# Altium PCB WiDSO.PcbDoc
Units mil, origin at the board's own origin, x right, y up, seen from the top; angles counter-clockwise.
Board outline 3366.26 x 2126.1 mil, 2 copper layers (Component Side, Bottom Layer), stack 12.8 mil thick; 52 components, 116 nets, 361 pads, 118 vias.
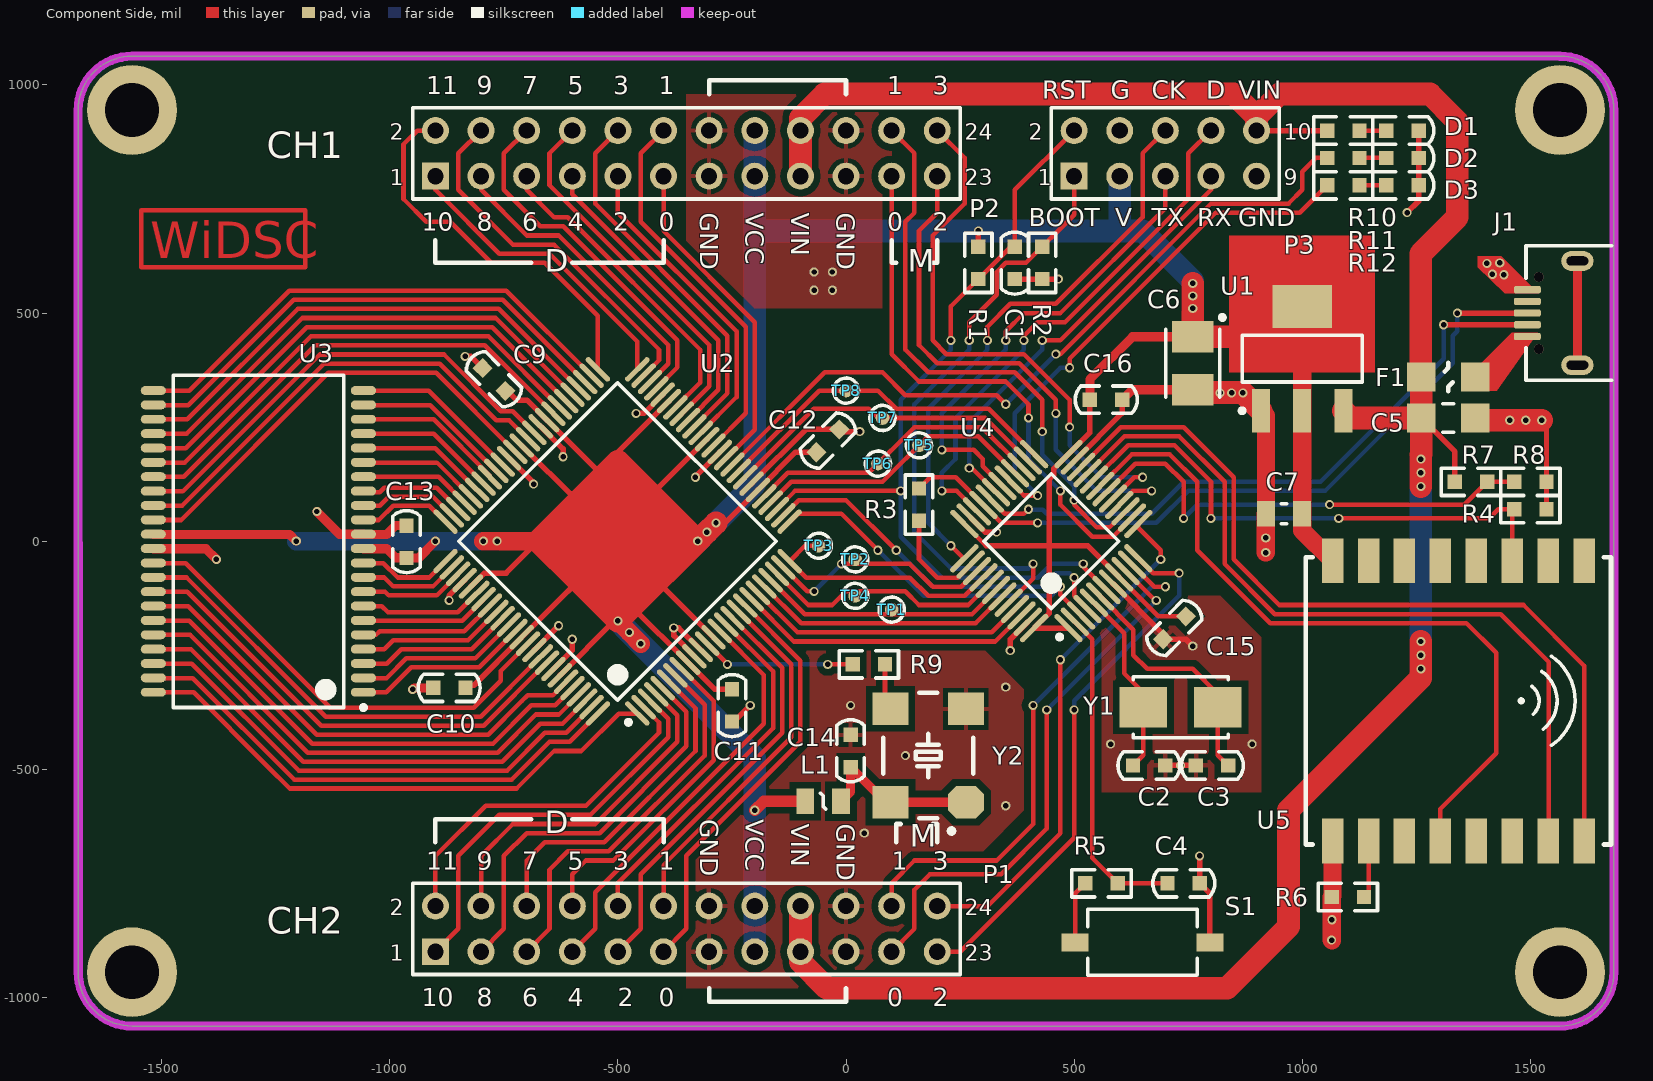
[diagram p0: Component Side view]
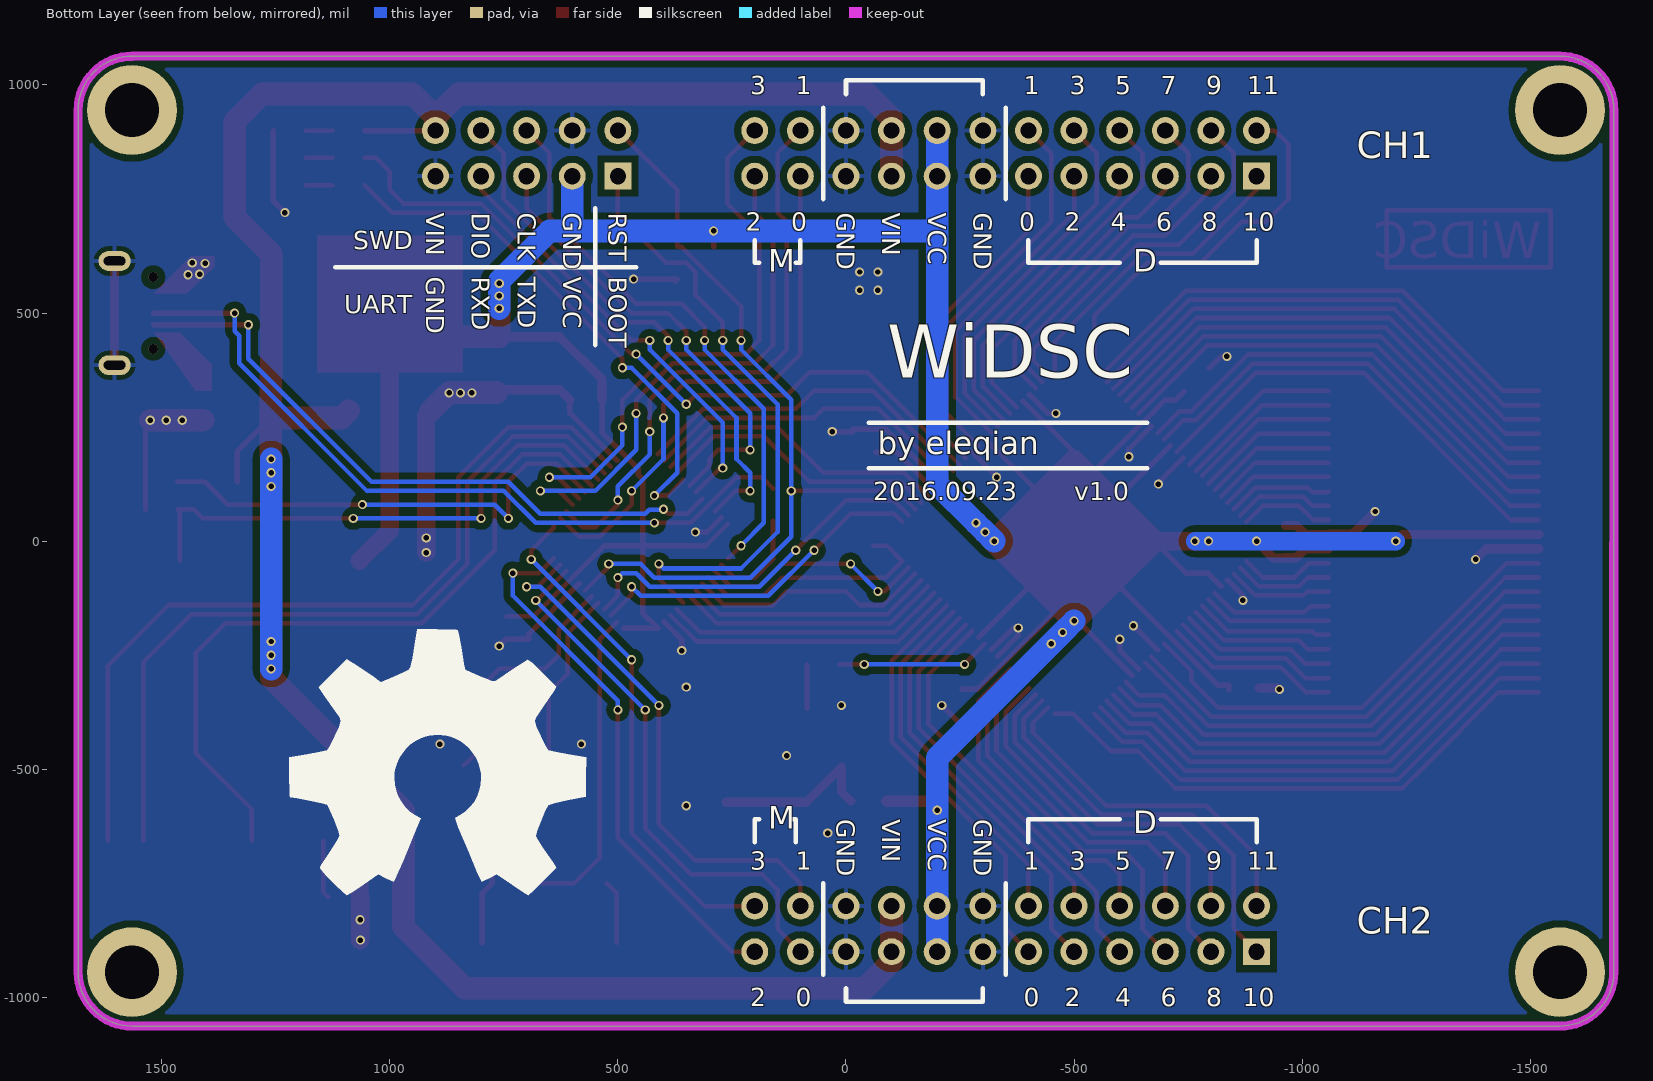
[diagram p1: Bottom Layer view, seen from below]

## Layer stack, top to bottom
Top Solder: solder mask 0.4, Solder Resist, Dk 3.5
Component Side: signal copper 1.4
Dielectric 1: core 10, FR-4, Dk 4.2
Bottom Layer: signal copper 1.4
Solder Side: solder mask 0.4, Solder Resist, Dk 3.5

## Board outline
-1683.07,-944.88 -1683.18,944.99 cw(c-1565.07,944.99) -1565.07,1063.1 1564.96,1063.1 1564.96,1062.99 cw(c1564.96,944.88) 1683.07,944.88 1683.07,-944.88 cw(c1564.96,-944.88) 1564.96,-1062.99 -1564.96,-1062.99 cw(c-1564.96,-944.88)

## Design rules (kind name [scope] priority, off if disabled: settings)
Clearance Clearance_Polygon [InNamedPolygon('GND-T') Or InNamedPolygon('GND-B')] p1: gap=15
Clearance [All] p2: gap=6
DiffPairsRouting [All] p1: maxlimit=10 minlimit=8 mostfreqgap=10 toplayer_minwidth=15 toplayer_maxwidth=15 toplayer_prefwidth=15 bottomlayer_minwidth=15 bottomlayer_maxwidth=15 bottomlayer_prefwidth=15 maxuncoupledlength=500
HoleSize [All] p1: absolutevalues=TRUE maxlimit=1574.8 minlimit=3.94 maxpercent=80.000 minpercent=20.000
MinimumSolderMaskSliver [All] p1: minsoldermaskwidth=0
PolygonConnect PolygonConnect_Via [IsVia] p1: connectstyle=Direct reliefconductorwidth=10 reliefentries=4 polygonreliefangle="90 Angle" airgapwidth=10
PolygonConnect [All] p2: connectstyle=Relief reliefconductorwidth=10 reliefentries=4 polygonreliefangle="90 Angle" airgapwidth=10
RoomDefinition SampleCtrl [InComponentClass('SampleCtrl')] p1 off: confinementstyle=ConfineIn formatcopy=TRUE lockcomponents=FALSE outline 1754.57,580 1980,580 1980,745 1754.57,745
RoomDefinition PowerMisc [InComponentClass('PowerMisc')] p2 off: confinementstyle=ConfineIn formatcopy=TRUE lockcomponents=FALSE outline 1758.11,190 1970,190 1970,333.15 1758.11,333.15
RoomDefinition ExtConn [InComponentClass('ExtConn')] p3 off: confinementstyle=ConfineIn formatcopy=TRUE lockcomponents=FALSE outline 1760,775 1970,775 1970,965 1760,965
RoomDefinition DSPComm [InComponentClass('DSPComm')] p4 off: confinementstyle=ConfineIn formatcopy=TRUE lockcomponents=FALSE outline 1758.43,390 1970,390 1970,540 1758.43,540
RoutingVias [All] p1: holewidth=12 width=24 viastyle="Through Hole" minholewidth=12 minwidth=20 maxholewidth=60 maxwidth=80
SMDNeckDown [All] p1: percent=150.000
SilkToSilkClearance [All] p1: silktosilkclearance=0
SilkToSolderMaskClearance SilkscreenOverComponentPads [IsPad] p1: minsilkscreentomaskgap=6 clearancetoexposedcopper=TRUE
SolderMaskExpansion [All] p1: expansion=4
Width Width_Power [InNet('GND') OR InNet('VCC') OR InNet('VIN')] p1: maxlimit=50 minlimit=10 preferedwidth=20
Width [All] p2: maxlimit=50 minlimit=8 preferedwidth=10
25 further rules are at their usual default settings.

## Classes and differential pairs
component class PowerMisc: C1 C4 C5 C6 C9 C10 C11 C12 C13 C15 C16 D1 D2 D3 R1 R5 R10 R11 R12 S1 U1
net class CH2_M[0..3]: CH2_M0 CH2_M1 CH2_M2 CH2_M3
net class CH1_M[0..3]: CH1_M0 CH1_M1 CH1_M2 CH1_M3
net class CH2_D[0..11]: CH2_CPLD0 CH2_CPLD1 CH2_CPLD2 CH2_CPLD3 CH2_CPLD4 CH2_CPLD5 CH2_CPLD6 CH2_CPLD7 CH2_CPLD8 CH2_CPLD9 CH2_CPLD10 CH2_CPLD11 CH2_D0 CH2_D1 CH2_D2 CH2_D3 CH2_D4 CH2_D5 CH2_D6 CH2_D7 CH2_D8 CH2_D9 CH2_D10 CH2_D11
net class CH1_D[0..11]: CH1_CPLD0 CH1_CPLD1 CH1_CPLD2 CH1_CPLD3 CH1_CPLD4 CH1_CPLD5 CH1_CPLD6 CH1_CPLD7 CH1_CPLD8 CH1_CPLD9 CH1_CPLD10 CH1_CPLD11 CH1_D0 CH1_D1 CH1_D2 CH1_D3 CH1_D4 CH1_D5 CH1_D6 CH1_D7 CH1_D8 CH1_D9 CH1_D10 CH1_D11
component class ExtConn: P1 P2
component class SampleCtrl: C14 L1 R9 TP1 TP2 TP3 TP4 TP5 TP6 TP7 TP8 U2 U3 Y2
component class DSPComm: C2 C3 C7 F1 J1 P3 R2 R3 R4 R6 R7 R8 U4 U5 Y1
net class MISC[0..2]: MISC0 MISC1 MISC2
net class NIRQ[0..1]: NIRQ0 NIRQ1
net class D[0..15]: D0 D1 D2 D3 D4 D5 D6 D7 D8 D9 D10 D11 D12 D13 D14 D15
net class A[0..18]: A0 A1 A2 A3 A4 A5 A6 A7 A8 A9 A10 A11 A12 A13 A14 A15 A16 A17 A18

## Components (designator, comment, footprint, x,y, rotation, side; value= is the part's Value field where it differs from the comment)
C1 "Cap" 0603C 370,610 r270 top
C2 "Cap" 0603C 664.6,-491.7 r180 top
C3 "Cap" 0603C 802.39,-491.7 r0 top
C4 "Cap" 0603C 740,-750 r0 top
C5 "Cap" 1206C 1320,270 r0 top
C6 "Cap Pol3" CAP3528T 760,390 r270 top
C7 "Cap" 0805C 960,60 r180 top
C9 "Cap" 0603C -771.54,354.48 r135 top
C10 "Cap" 0603C -869.54,-321.52 r180 top
C11 "Cap" 0603C -250,-360 r270 top
C12 "Cap" 0603C -40,220 r45 top
C13 "Cap" 0603C -963.34,-1.47 r90 top
C14 "Cap" 0603C 10,-460 r90 top
C15 "Cap" 0603C 720,-190 r225 top
C16 "Cap" 0603C 570,310 r0 top
D1 "RED" 0603LED 1220,900 r0 top
D2 "BLUE" 0603LED 1220,840 r0 top
D3 "GREEN" 0603LED 1220,780 r0 top
F1 "1A" 1206F 1320,360 r0 top
J1 "MicroUSB-B_2P" MICRO-USB-B-2P 1550,500 r180 top locked
L1 "Inductor" 0805L -50,-570 r180 top
P1 "Header 12X2" HDR2X12 -900,-900 r0 top locked
P2 "Header 12X2" HDR2X12 -900,800 r0 top locked
P3 "Header 5X2" HDR2X5 500,800 r0 top locked
R1 "Res3" 0603R 290,610 r90 top
R2 "Res3" 0603R 430,610 r270 top
R3 "Res3" 0603R 160,80 r90 top
R4 "Res3" 0603R 1500,70 r0 top
R5 "Res3" 0603R 560,-750 r0 top
R6 "Res3" 0603R 1100,-780 r180 top
R7 "Res3" 0603R 1370,130 r0 top
R8 "Res3" 0603R 1500,130 r0 top
R9 "Res3" 0603R 50,-270 r180 top
R10 "Res3" 0603R 1090,900 r180 top
R11 "Res3" 0603R 1090,840 r180 top
R12 "Res3" 0603R 1090,780 r180 top
S1 "SW-PB" SPST-SM2 650,-880 r180 top
TP1 "TestPoint" TPOINT-30 100,-150 r0 top
TP2 "TestPoint" TPOINT-30 20,-40 r0 top
TP3 "TestPoint" TPOINT-30 -60,-10 r0 top
TP4 "TestPoint" TPOINT-30 20,-120 r0 top
TP5 "TestPoint" TPOINT-30 160,210 r0 top
TP6 "TestPoint" TPOINT-30 70,170 r0 top
TP7 "TestPoint" TPOINT-30 80,270 r0 top
TP8 "TestPoint" TPOINT-30 0,330 r0 top
U1 "ASM1117" SOT223 1000,400 r90 top
U2 "EPM570T100C5N" TQFP100_N -500.74,-0.52 r135 top locked
U3 "IS61LV25616AL" TSOP-2L -1288.14,-0.52 r180 top locked
U4 "STM32F103C8T6" LQFP48_M 450,0 r135 top locked
U5 "ESP-12" ESP-12 1480,-350 r270 top locked
Y1 "XTAL-8M" XTAL_5032_2P 733.5,-363.75 r180 top
Y2 "XTAL4A" XTAL_7050_4P 180,-470 r90 top

## Footprints (in the part's own frame and the unit in brackets; to place one, negate y for a bottom-side part, rotate by r counter-clockwise, add the part's x,y. Pads: shape width x height; smd on the part's side, far side on the other; paste and mask are expansions set on the pad)
0603C [mm] "贴片电容"
  rect 0.8x0.8 smd: 1(-0.9,0) 2(0.9,0)
  silkscreen extent -1.72,-0.76 1.74,0.76, body extent -0.9,-0.4 0.9,0.4, height 0.8
0603LED [mm] "贴片LED"
  rect 0.8x0.8 smd: 1(-0.9,0) 2(0.9,0)
  silkscreen extent -1.65,-0.76 1.74,0.76, body extent -0.9,-0.4 0.9,0.4, height 0.5
0603R [mm] "贴片电阻"
  rect 0.8x0.8 smd: 1(-0.9,0) 2(0.9,0)
  silkscreen extent -1.65,-0.76 1.65,0.76, body extent -0.9,-0.4 0.9,0.4, height 0.45
0805C [mm] "贴片电容"
  rect 1x1.4 smd: 1(-1,0) 2(1,0)
  silkscreen extent -0.15,-0.55 0.15,0.55, body extent -1.07,-0.7 1.07,0.7, height 0.8
0805L [mm] "贴片电感"
  rect 1x1.4 smd: 1(-1,0) 2(1,0)
  silkscreen extent -0.15,-0.45 0.15,0.45, body extent -1.07,-0.7 1.07,0.7, height 1
1206C [mm] "Chip Capacitor; Body 3.2 x 1.6 mm (LxW typ)"
  rect 1.6x1.6 smd: 1(-1.5,0) 2(1.5,0)
  silkscreen extent -0.3,-0.8 0.3,0.8, body extent -1.6,-0.8 1.6,0.8, height 0.8
1206F [mm] "Chip Fuse; Body 3.2 x 1.6 mm (LxW typ)"
  rect 1.6x1.6 smd: 1(-1.5,0) 2(1.5,0)
  silkscreen extent -0.2,-0.8 0.25,0.8, body extent -1.6,-0.8 1.6,0.8, height 0.8
CAP3528T [mm] "Capacitor Tantalum Leadless Type B, 3.5x2.8mm"
  rect 1.75x2.3 smd: 1(-1.475,0) 2(1.475,0)
  silkscreen extent -2.67,-1.5 1.9,1.78, body extent -1.85,-1.45 1.85,1.45, height 2.01
ESP-12 [mm] "串口Wifi模块"
  rect 2.5x1.2 smd: 1(-7.8,3.5) 2(-7.8,1.5) 3(-7.8,-0.5) 4(-7.8,-2.5) 5(-7.8,-4.5) 6(-7.8,-6.5) 7(-7.8,-8.5) 8(-7.8,-10.5) 9(7.8,-10.5) 10(7.8,-8.5) 11(7.8,-6.5) 12(7.8,-4.5) 13(7.8,-2.5) 14(7.8,-0.5) 15(7.8,1.5) 16(7.8,3.5)
  silkscreen extent -8,-12 8,5, body extent -8,-12 8,12, height 3.5
HDR2X5 [mm] "Connector; Header; 5x2 Position"
  rect 1.5x1.5 hole 0.9: 1(0,0)
  round 1.5 hole 0.9: 2(0,2.54) 3(2.54,0) 4(2.54,2.54) 5(5.08,0) 6(5.08,2.54) 7(7.62,0) 8(7.62,2.54) 9(10.16,0) 10(10.16,2.54)
  silkscreen extent -1.27,-1.27 11.43,3.81
HDR2X12 [mm] "Connector; Header; 12x2 Position"
  rect 1.5x1.5 hole 0.9: 1(0,0)
  round 1.5 hole 0.9: 2(0,2.54) 3(2.54,0) 4(2.54,2.54) 5(5.08,0) 6(5.08,2.54) 7(7.62,0) 8(7.62,2.54) 9(10.16,0) 10(10.16,2.54) 11(12.7,0) 12(12.7,2.54) 13(15.24,0) 14(15.24,2.54) 15(17.78,0) 16(17.78,2.54) 17(20.32,0) 18(20.32,2.54) 19(22.86,0) 20(22.86,2.54) 21(25.4,0) 22(25.4,2.54) 23(27.94,0) 24(27.94,2.54)
  silkscreen extent -1.27,-1.27 29.21,3.81
LQFP48_M [mm] "Thin QFP, 48-Leads, Body 7x7mm, Pitch 0.5mm, IPC Low Density"
  oval 2.1x0.3 smd: 1(-4.1,2.75) 2(-4.1,2.25) 3(-4.1,1.75) 4(-4.1,1.25) 5(-4.1,0.75) 6(-4.1,0.25) 7(-4.1,-0.25) 8(-4.1,-0.75) 9(-4.1,-1.25) 10(-4.1,-1.75) 11(-4.1,-2.25) 12(-4.1,-2.75) 25(4.1,-2.75) 26(4.1,-2.25) 27(4.1,-1.75) 28(4.1,-1.25) 29(4.1,-0.75) 30(4.1,-0.25) 31(4.1,0.25) 32(4.1,0.75) 33(4.1,1.25) 34(4.1,1.75) 35(4.1,2.25) 36(4.1,2.75)
  oval 0.3x2.1 smd: 13(-2.75,-4.1) 14(-2.25,-4.1) 15(-1.75,-4.1) 16(-1.25,-4.1) 17(-0.75,-4.1) 18(-0.25,-4.1) 19(0.25,-4.1) 20(0.75,-4.1) 21(1.25,-4.1) 22(1.75,-4.1) 23(2.25,-4.1) 24(2.75,-4.1) 37(2.75,4.1) 38(2.25,4.1) 39(1.75,4.1) 40(1.25,4.1) 41(0.75,4.1) 42(0.25,4.1) 43(-0.25,4.1) 44(-0.75,4.1) 45(-1.25,4.1) 46(-1.75,4.1) 47(-2.25,4.1) 48(-2.75,4.1)
  silkscreen extent -4.22,-2.65 2.65,3.57, body extent -3.5,-3.5 3.5,3.5, height 1.6
MICRO-USB-B-2P [mm] "直插2脚固定MicroUSB贴片母座"
  rrect50% 1.5x0.4 smd: 1(1.438,1.3) 2(1.438,0.65) 3(1.438,0) 4(1.438,-0.65) 5(1.438,-1.3)
  oval 1.8x1.1 hole 0.5 slot 1.2 at 0 deg: 6(-1.35,2.9) 7(-1.35,-2.9)
  silkscreen extent -3.25,-3.75 1.51,3.75, body extent -4,-4 1.5,4, height 2.8
SOT223 [mm] "SOT223, 4-Leads, Body 6.7x7.3mm (max), Pitch 2.30mm, IPC Medium Density"
  rect 2.4x1 smd: 1(-2.9,2.3) 2(-2.9,0) 3(-2.9,-2.3)
  rect 2.4x3.3 smd: 4(2.9,0)
  silkscreen extent -3.02,-3.35 1.3,3.47, body extent -1.85,-3.35 1.85,3.35, height 1.8
SPST-SM2 [mm] "贴片按键"
  rect 1.5x1 smd: 1(-3.75,0) 2(3.75,0)
  silkscreen extent -3.05,-1.85 3.05,1.83, body extent -3.02,-1.85 3.08,1.85, height 2.5
TPOINT-30 [mil] "测试点30*30mil"
  round 30 smd: 1(0,0)
  silkscreen extent -27,-28 28,28
TQFP100_N [mm] "Thin QFP, 100-Leads, Body 14x14mm, Pitch 0.5mm, IPC Medium Density"
  oval 1.8x0.3 smd: 1(-7.55,6) 2(-7.55,5.5) 3(-7.55,5) 4(-7.55,4.5) 5(-7.55,4) 6(-7.55,3.5) 7(-7.55,3) 8(-7.55,2.5) 9(-7.55,2) 10(-7.55,1.5) 11(-7.55,1) 12(-7.55,0.5) 13(-7.55,0) 14(-7.55,-0.5) 15(-7.55,-1) 16(-7.55,-1.5) 17(-7.55,-2) 18(-7.55,-2.5) 19(-7.55,-3) 20(-7.55,-3.5) 21(-7.55,-4) 22(-7.55,-4.5) 23(-7.55,-5) 24(-7.55,-5.5) 25(-7.55,-6) 51(7.55,-6) 52(7.55,-5.5) 53(7.55,-5) 54(7.55,-4.5) 55(7.55,-4) 56(7.55,-3.5) 57(7.55,-3) 58(7.55,-2.5) 59(7.55,-2) 60(7.55,-1.5) 61(7.55,-1) 62(7.55,-0.5) 63(7.55,0) 64(7.55,0.5) 65(7.55,1) 66(7.55,1.5) 67(7.55,2) 68(7.55,2.5) 69(7.55,3) 70(7.55,3.5) 71(7.55,4) 72(7.55,4.5) 73(7.55,5) 74(7.55,5.5) 75(7.55,6)
  oval 0.3x1.8 smd: 26(-6,-7.55) 27(-5.5,-7.55) 28(-5,-7.55) 29(-4.5,-7.55) 30(-4,-7.55) 31(-3.5,-7.55) 32(-3,-7.55) 33(-2.5,-7.55) 34(-2,-7.55) 35(-1.5,-7.55) 36(-1,-7.55) 37(-0.5,-7.55) 38(0,-7.55) 39(0.5,-7.55) 40(1,-7.55) 41(1.5,-7.55) 42(2,-7.55) 43(2.5,-7.55) 44(3,-7.55) 45(3.5,-7.55) 46(4,-7.55) 47(4.5,-7.55) 48(5,-7.55) 49(5.5,-7.55) 50(6,-7.55) 76(6,7.55) 77(5.5,7.55) 78(5,7.55) 79(4.5,7.55) 80(4,7.55) 81(3.5,7.55) 82(3,7.55) 83(2.5,7.55) 84(2,7.55) 85(1.5,7.55) 86(1,7.55) 87(0.5,7.55) 88(0,7.55) 89(-0.5,7.55) 90(-1,7.55) 91(-1.5,7.55) 92(-2,7.55) 93(-2.5,7.55) 94(-3,7.55) 95(-3.5,7.55) 96(-4,7.55) 97(-4.5,7.55) 98(-5,7.55) 99(-5.5,7.55) 100(-6,7.55)
  silkscreen extent -7.67,-6.25 6.25,6.82, body extent -7,-7 7,7, height 1.2
TSOP-2L [mm] "TSOP, 44-Leads, Body 18.40x10.16mm, Pitch 0.80mm, IPC Low Density"
  oval 1.4x0.5 smd: 1(-5.85,8.4) 2(-5.85,7.6) 3(-5.85,6.8) 4(-5.85,6) 5(-5.85,5.2) 6(-5.85,4.4) 7(-5.85,3.6) 8(-5.85,2.8) 9(-5.85,2) 10(-5.85,1.2) 11(-5.85,0.4) 12(-5.85,-0.4) 13(-5.85,-1.2) 14(-5.85,-2) 15(-5.85,-2.8) 16(-5.85,-3.6) 17(-5.85,-4.4) 18(-5.85,-5.2) 19(-5.85,-6) 20(-5.85,-6.8) 21(-5.85,-7.6) 22(-5.85,-8.4) 23(5.85,-8.4) 24(5.85,-7.6) 25(5.85,-6.8) 26(5.85,-6) 27(5.85,-5.2) 28(5.85,-4.4) 29(5.85,-3.6) 30(5.85,-2.8) 31(5.85,-2) 32(5.85,-1.2) 33(5.85,-0.4) 34(5.85,0.4) 35(5.85,1.2) 36(5.85,2) 37(5.85,2.8) 38(5.85,3.6) 39(5.85,4.4) 40(5.85,5.2) 41(5.85,6) 42(5.85,6.8) 43(5.85,7.6) 44(5.85,8.4)
  silkscreen extent -5.98,-9.25 4.75,9.37, body extent -5.15,-9.25 5.15,9.25, height 1.2
XTAL_5032_2P [mm] "2脚5mm*3.2mm贴片晶振"
  rect 2.65x2.25 smd: 1(-2.075,0) 2(2.075,0)
  silkscreen extent -2.65,-1.7 2.65,1.7, body extent -2.6,-1.7 2.6,1.7, height 1.5
XTAL_7050_4P [mm] "4脚7mm*5mm贴片晶振"
  oct 1.8x2 smd: 1(-2.6,-2.1)
  rect 1.8x2 smd: 2(2.6,-2.1) 3(2.6,2.1) 4(-2.6,2.1)
  silkscreen extent -4.34,-2.5 3.5,2.5, body extent -3.5,-2.5 3.5,2.5, height 1.4

## Part data
C1 C2 C3 C4 C5 C7 C9 C10 C11 C12 C13 C14 C15 C16: "Capacitor"
C6: "Polarized Capacitor (Surface Mount)"
D1 D2 D3: library part LED1, "Typical RED GaAs LED"
F1: library part "Fuse Thermal", "Thermal Fuse"
J1: "MicroUSB母座"
P1 P2: "Header, 12-Pin, Dual row"
P3: "Header, 5-Pin, Dual row"
R1 R2 R3 R4 R5 R6 R7 R8 R9 R10 R11 R12: "Resistor"
S1: "Switch"
TP1 TP2 TP3 TP4 TP5 TP6 TP7 TP8: "测试点"
U1: library part "Volt Reg", "Voltage Regulator"
U2: "MAX II 3.3/2.5V CPLD, 76 IOs, 570 Logic Elements, 100-Pin Plastic TQFP, Commercial Temperature, Speed Grade 5, Pb-Free"
U3: "256K*16 SRAM, 3.3V"
U4: "STM32 ARM-based 32-bit MCU with 64 Kbytes Flash, 48-pin LQFP, Industrial Temperature"
U5: "串口Wifi模块"
Y1: library part XTAL, "Crystal Oscillator"
Y2: "4脚有源晶振"

## Free pads (board coordinates)
  round 196.85 hole 118.11: 0(-1565.07,944.99) 0(-1564.96,-944.88) 0(1564.96,-944.88) 0(1564.96,944.88)

## Via types
v1: diameter 20, hole 12, Component Side to Bottom Layer, 116 vias
v2: diameter 21.65, hole 21.65, Component Side to Bottom Layer, 2 vias

## Nets (pads, with @x,y where several pads share a name; then routed paths per layer and width w, separated by ;. In a path a pad name is that pad's centre, name@x,y a point inside that pad or via, vN(x,y) a via of type N, cw(c..) or ccw(c..) an arc to the next point about the centre after c; other vN are vias at no path point)
A0: U2.87 U3.1 | length 388.7
  Component Side w10: U3.1@-1057.83,-331.63 -1008.19,-331.63 -953.08,-276.51 -804.17,-276.51 U2.87@-724.84,-197.18
A1: U2.86 U3.2 | length 367.5
  Component Side w10: U3.2@-1057.83,-300.13 -1007.28,-300.13 -963.97,-256.83 -812.33,-256.83 U2.86@-738.76,-183.26
A2: U2.85 U3.3 | length 346.3
  Component Side w10: U3.3@-1057.83,-268.64 -1006.36,-268.64 -974.87,-237.14 -820.48,-237.14 U2.85@-752.68,-169.34
A3: U2.84 U3.4 | length 325.1
  Component Side w10: U3.4@-1057.83,-237.14 -1012.55,-237.14 -992.87,-217.45 -828.63,-217.45 U2.84@-766.6,-155.43
A4: U2.83 U3.5 | length 303.9
  Component Side w10: U3.5@-1057.83,-205.64 -1030.27,-205.64 -1022.4,-197.77 -836.79,-197.77 U2.83@-780.52,-141.51
A5: U2.70 U3.18 | length 287.6
  Component Side w10: U3.18@-1057.83,203.8 -900.34,203.8 U2.70@-808.36,111.83
A6: U2.69 U3.19 | length 308.8
  Component Side w10: U3.19@-1057.83,235.3 -904,235.3 U2.69@-794.44,125.75
A7: U2.68 U3.20 | length 328.3
  Component Side w10: U3.20@-1057.83,266.8 -903.72,266.8 U2.68@-780.52,143.6
A8: U2.67 U3.21 | length 351.2
  Component Side w10: U3.21@-1057.83,298.29 -911.31,298.29 U2.67@-766.6,153.59
A9: U2.66 U3.22 | length 372.4
  Component Side w10: U3.22@-1057.83,329.79 -914.97,329.79 U2.66@-752.68,167.51
A10: U2.52 U3.23 | length 1128.8
  Component Side w10: U3.23@-1518.46,329.79 -1439.72,329.79 -1220.43,549.08 -744.51,549.08 U2.52@-557.81,362.38
A11: U2.53 U3.24 | length 1117.2
  Component Side w10: U3.24@-1518.46,298.29 -1441.69,298.29 -1210.9,529.08 -752.21,529.08 U2.53@-571.66,348.53
A12: U2.54 U3.25 | length 1105.1
  Component Side w10: U3.25@-1518.46,266.8 -1443.66,266.8 -1201.37,509.08 -761.47,509.08 U2.54@-586.29,333.9
A13: U2.55 U3.26 | length 1093.8
  Component Side w10: U3.26@-1518.46,235.3 -1445.62,235.3 -1191.84,489.08 -768.03,489.08 U2.55@-599.57,320.62
A14: U2.56 U3.27 | length 1082.1
  Component Side w10: U3.27@-1518.46,203.8 -1447.59,203.8 -1182.32,469.08 -775.87,469.08 U2.56@-613.49,306.7
A15: U2.99 U3.42 | length 1115.1
  Component Side w10: U3.42@-1518.46,-268.64 -1433.81,-268.64 -1199.56,-502.89 -742.89,-502.89 -660,-420 -613.6,-420 U2.99@-557.81,-364.22
A16: U2.100 U3.43 | length 1126.5
  Component Side w10: U3.43@-1518.46,-300.13 -1431.84,-300.13 -1209.4,-522.57 -732.57,-522.57 -650,-440 -605.76,-440 U2.100@-543.89,-378.14
A17: U2.1 U3.44 | length 1216.1
  Component Side w10: U3.44@-1518.46,-331.63 -1429.88,-331.63 -1268.46,-493.05 -1219.25,-542.26 -722.26,-542.26 -640,-460 -580,-460 -498.14,-378.14 U2.1@-457.59,-378.14
A18: U2.57 U3.28 | length 1070.4
  Component Side w10: U3.28@-1518.46,172.31 -1449.56,172.31 -1172.79,449.08 -783.71,449.08 U2.57@-627.41,292.78
ADC_VIN: R7.2 R8.1 U4.18 | length 1050.4
  Component Side w10: U4.18 633.92,170 700,170 740,130 v1(740,50) ; v1(1060,80) 1355.43,80 R7.2 R8.1 R8.1@1465.43,130.86
  Bottom Layer w10: v1(740,50) 770,80 v1(1060,80)
BOOT0: P3.1 R2.1 U4.44 | length 1355.4
  Component Side w10: v1(270,440) 270,480 330,540 330,590 350,610 394.57,610 500,715.43 P3.1 ; U4.44 410,-81.76 v1(410,-50)
  Bottom Layer w10: v1(270,440) 270,420 150,300 150,20 230,-60 400,-60 v1(410,-50)
CE#: U2.82 U3.6 | length 282.7
  Component Side w10: U3.6@-1057.83,-174.15 -841,-174.15 U2.82@-794.44,-127.59
CH1_D0: P1.11 U2.18 | length 933.3
  Component Side w10: P1.11 -350,-850 -350,-690 -100,-440 -100,-262.07 U2.18
CH1_D1: P1.12 U2.17 | length 808.5
  Component Side w10: P1.12 -400,-710 -120,-430 -120,-269.91 U2.17
CH1_D2: P1.9 U2.16 | length 925.2
  Component Side w10: P1.9 -450,-850 -450,-730 -140,-420 -140,-277.74 U2.16
CH1_D3: P1.10 U2.15 | length 800.5
  Component Side w10: P1.10 -500,-750 -160,-410 -160,-285.58 U2.15
CH1_D4: P1.7 U2.14 | length 917.2
  Component Side w10: P1.7 -550,-850 -550,-770 -180,-400 -180,-293.42 U2.14
CH1_D5: P1.8 U2.8 | length 712.3
  Component Side w10: P1.8 -600,-730 -570,-700 -510,-700 -290,-480 -290,-350.46 U2.8
CH1_D6: P1.5 U2.7 | length 846.6
  Component Side w10: P1.5 -650,-850 -650,-720 -610,-680 -520,-680 -310,-470 -310,-358.29 U2.7
CH1_D7: P1.6 U2.6 | length 745.3
  Component Side w10: P1.6 -700,-700 -660,-660 -530,-660 -330,-460 -330,-366.13 U2.6
CH1_D8: P1.3 U2.5 | length 879.6
  Component Side w10: P1.3 -750,-850 -750,-690 -700,-640 -540,-640 -350,-450 -350,-373.97 U2.5
CH1_D9: P1.4 U2.4 | length 766.6
  Component Side w10: P1.4 -800,-690 -730,-620 -550,-620 -370,-440 -370,-381.81 U2.4
CH1_D10: P1.1 U2.3 | length 895
  Component Side w10: P1.1 -850,-850 -850,-690 -760,-600 -560,-600 -390,-430 -390,-389.65 U2.3
CH1_D11: P1.2 U2.2 | length 782
  Component Side w10: P1.2 -900,-690 -790,-580 -570,-580 -410,-420 -410,-397.49 U2.2
CH1_M0: P1.21 U4.10 | length 1195.5
  Component Side w10: P1.21 150,-850 150,-764 184,-730 340,-730 440,-630 v1(440,-370) ; U4.10 677.43,-130 v1(680,-130)
  Bottom Layer w10: v1(440,-370) v1(680,-130)
CH1_M1: P1.22 U4.11 | length 1164.9
  Component Side w10: P1.22 100,-750 150,-700 330,-700 410,-620 v1(410,-360) ; U4.11 675.28,-100 v1(700,-100)
  Bottom Layer w10: v1(410,-360) 670,-100 v1(700,-100)
CH1_M2: P1.23 U4.12 | length 1181.6
  Component Side w10: P1.23 250,-900 500,-650 v1(500,-370) ; U4.12 673.11,-70 v1(730,-70)
  Bottom Layer w10: v1(500,-370) 500,-350 730,-120 v1(730,-70)
CH1_M3: P1.24 U4.13 | length 1125.4
  Component Side w10: P1.24 310,-800 470,-640 v1(470,-260) ; U4.13 640.7,29.3 690,-20 v1(690,-40)
  Bottom Layer w10: v1(470,-260) v1(690,-40)
CH2_D0: P2.11 U2.36 | length 727
  Component Side w10: P2.11 -400,680 -200,480 -200,244.54 U2.36
CH2_D1: P2.12 U2.38 | length 835.5
  Component Side w10: P2.12 -450,850 -450,700 -220,470 -220,280.22 U2.38
CH2_D2: P2.9 U2.40 | length 702.7
  Component Side w10: P2.9 -500,720 -240,460 -240,315.9 U2.40
CH2_D3: P2.10 U2.41 | length 819.4
  Component Side w10: P2.10 -550,850 -550,740 -260,450 -260,323.74 U2.41
CH2_D4: P2.7 U2.42 | length 694.6
  Component Side w10: P2.7 -600,760 -280,440 -280,331.58 U2.42
CH2_D5: P2.8 U2.43 | length 811.3
  Component Side w10: P2.8 -650,850 -650,780 -300,430 -300,339.42 U2.43
CH2_D6: P2.5 U2.44 | length 704.2
  Component Side w10: P2.5 -700,770 -640,710 -610,710 -320,420 -320,347.25 U2.44
CH2_D7: P2.6 U2.47 | length 791.4
  Component Side w10: P2.6 -750,850 -750,770 -670,690 -620,690 -370,440 -370,380.77 U2.47
CH2_D8: P2.3 U2.48 | length 678.4
  Component Side w10: P2.3 -800,770 -700,670 -630,670 -390,430 -390,388.61 U2.48
CH2_D9: P2.4 U2.49 | length 806.9
  Component Side w10: P2.4 -850,850 -850,770 -730,650 -640,650 -410,420 -410,396.45 U2.49
CH2_D10: P2.1 U2.50 | length 671
  Component Side w10: P2.1 -900,770 -760,630 -650,630 -457.59,437.59 U2.50
CH2_D11: P2.2 U2.51 | length 852.2
  Component Side w10: P2.2 -940,900 -970,870 -970,750 -920,700 -867.6,700 -777.6,610 -660,610 -543.89,493.89 U2.51@-543.89,376.3
CH2_M0: P2.21 U4.14 | length 1187.5
  Component Side w10: P2.21 100,410 160,350 350,350 400,300 v1(400,270) ; v1(470,110) 470,80 540,10 585.27,10 U4.14
  Bottom Layer w10: v1(400,270) 400,180 v1(470,110)
CH2_M1: P2.22 U4.15 | length 1261.8
  Component Side w10: P2.22 150,850 150,720 130,700 130,420 180,370 370,370 430,310 v1(430,240) ; v1(500,90) 500,80 550,30 577.44,30 U4.15
  Bottom Layer w10: v1(430,240) 430,190 500,120 v1(500,90)
CH2_M2: P2.23 U4.16 | length 1177.5
  Component Side w10: P2.23 200,720 160,680 160,430 200,390 380,390 460,310 v1(460,280) ; U4.16 629.8,110.2 630,110 v1(670,110)
  Bottom Layer w10: v1(460,280) 460,200 550,110 v1(670,110)
CH2_M3: P2.24 U4.17 | length 1241
  Component Side w10: P2.24 260,840 260,740 190,670 190,440 220,410 390,410 490,310 v1(490,250) ; U4.17 631.76,140 v1(650,140)
  Bottom Layer w10: v1(490,250) 490,210 560,140 v1(650,140)
CLK_100M: R9.2 U2.12 | length 339.6
  Component Side w10: U2.12 -259.1,-270 v1(-260,-270) ; v1(-40,-270) R9.2
  Bottom Layer w10: v1(-260,-270) v1(-40,-270)
D0: U2.81 U3.7 | length 272.6
  Component Side w10: U3.7@-1057.83,-142.65 -1017.35,-142.65 -1003.96,-156.04 -850.73,-156.04 U2.81@-808.36,-113.67
D1: U2.78 U3.8 | length 230.5
  Component Side w10: U3.8@-1057.83,-111.16 -1010.58,-111.16 -1002.71,-119.03 -897.24,-119.03 U2.78@-850.12,-71.91
D2: U2.77 U3.9 | length 219.1
  Component Side w10: U3.9@-1057.83,-79.66 -1012.55,-79.66 -992.87,-99.34 -905.39,-99.34 U2.77@-864.04,-57.99
D3: U2.76 U3.10 | length 207.7
  Component Side w10: U3.10@-1057.83,-48.16 -1014.52,-48.16 -983.02,-79.66 -913.55,-79.66 U2.76@-877.96,-44.07
D4: U2.75 U3.13 | length 207.7
  Component Side w10: U3.13@-1057.83,46.32 -1024.36,46.32 -992.87,77.82 -913.55,77.82 U2.75@-877.96,42.23
D5: U2.74 U3.14 | length 219.1
  Component Side w10: U3.14@-1057.83,77.82 -1022.4,77.82 -1002.71,97.51 -905.39,97.51 U2.74@-864.04,56.15
D6: U2.73 U3.15 | length 232.1
  Component Side w10: U3.15@-1057.83,109.32 -1055.86,107.35 -1022.4,107.35 -1012.55,117.19 -897.24,117.19 U2.73@-850.12,70.07
D7: U2.72 U3.16 | length 245.2
  Component Side w10: U3.16@-1057.83,140.81 -893.02,140.81 U2.72@-836.2,83.99
D8: U2.58 U3.29 | length 1058.8
  Component Side w10: U3.29@-1518.46,140.81 -1451.53,140.81 -1163.26,429.08 -791.55,429.08 U2.58@-641.33,278.86
D9: U2.61 U3.30 | length 1030.8
  Component Side w10: U3.30@-1518.46,109.32 -1453.5,109.32 -1153.73,409.08 -881.21,409.08 -756.65,284.51 -730.5,284.51 U2.61@-683.09,237.1
D10: U2.62 U3.31 | length 1019.1
  Component Side w10: U3.31@-1518.46,77.82 -1455.47,77.82 -1144.21,389.08 -890.74,389.08 -766.49,264.83 -738.65,264.83 U2.62@-697.01,223.18
D11: U2.64 U3.32 | length 999.3
  Component Side w10: U3.32@-1518.46,46.32 -1457.43,46.32 -1134.68,369.08 -898.58,369.08 U2.64@-724.84,195.34
D12: U2.89 U3.35 | length 1023.3
  Component Side w10: U3.35@-1518.46,-48.16 -1447.59,-48.16 -1130.66,-365.09 -815.7,-365.09 -756.65,-306.04 -756.65,-284.66 U2.89@-697.01,-225.02
D13: U2.91 U3.36 | length 1030.3
  Component Side w10: U3.36@-1518.46,-79.66 -1445.62,-79.66 -1140.51,-384.78 -801.08,-384.78 U2.91@-669.17,-252.86
D14: U2.92 U3.37 | length 1041.4
  Component Side w10: U3.37@-1518.46,-111.16 -1443.66,-111.16 -1150.35,-404.46 -794.21,-404.46 U2.92@-655.89,-266.14
D15: U2.95 U3.38 | length 1069.7
  Component Side w10: U3.38@-1518.46,-142.65 -1441.69,-142.65 -1160.19,-424.15 -784.15,-424.15 -710.19,-350.19 -697.44,-337.44 -642.39,-337.44 U2.95@-613.29,-308.34
ESP_BOOT: U4.19 U5.12 | length 1627.1
  Component Side w10: U4.19 626.08,190 710,190 770,130 770,-20 930,-180 1360,-180 1425,-245 1425,-465 1302.84,-587.16 U5.12
ESP_EN: R4.1 U4.20 U5.3 | length 1188.5
  Component Side w10: U4.20 618.24,210 720,210 800,130 v1(800,50) ; v1(1080,50) 1410,50 1430,70 R4.1 1460.32,65.75 U5.3
  Bottom Layer w10: v1(800,50) v1(1080,50)
ESP_RXD: U4.22 U5.16 | length 1844.8
  Component Side w10: U4.22 602.56,250 740,250 850,140 850,-40 950,-140 1485,-140 1617.8,-272.8 U5.16
ESP_TXD: U4.21 U5.15 | length 1747.2
  Component Side w10: U4.21 610.4,230 730,230 830,130 830,-50 940,-160 1435,-160 1540,-265 1540,-656.14 U5.15
GND: C1.2 C2.1 C3.1 C4.2 C5.2 C6.2 C7.2 C9.2 C10.2 C11.2 C12.2 C13.2 C14.2 C15.2 C16.2 D1.2 D2.2 D3.2 J1.5 J1.6 J1.7 P1.13 P1.14 P1.19 P1.20 P2.13 P2.14 P2.19 P2.20 P3.4 P3.9 R2.2 R4.2 R6.2 R8.2 S1.1 U1.1 U2.10 U2.11 U2.32 U2.37 U2.46 U2.60 U2.65 U2.79 U2.90 U2.93 U3.12 U3.34 U4.8 U4.23 U4.35 U4.47 U5.9 Y2.2 | length 4053.4
  Component Side w12: v1(-870,-130) -870,-119.23 U2.79 ; v1(-835,405) -822.06,405 C9.2 ; U2.65 -685,128.06 v1(-685,125) ; U2.90 v1(-630,-185.46) ; U2.60 -620,202.26 v1(-620,185) ; U2.93 -600,-238.97 v1(-600,-215) ; v1(-460,280) -442.93,280 U2.46 ; U2.10 -377.5,-207.28 v1(-377.5,-190) -366.94,-190 U2.11 ; v1(-330,140) -332.38,140 U2.37 ; C11.2 -245.43,-395.43 v1(-210,-360) ; U2.32 -88.13,245.06 C12.2 ; C12.2@-14.95,240 v1(30,240) ; U4.35 304.72,20 v1(330,20) ; v1(360,-240) 360,-215.27 U4.47 ; C1.2@374.57,570 C1.2 R2.2 v1(465.43,574.57) ; U4.23 605.43,280.71 C16.2 ; U4.8 694.95,-203.19 C15.2 745.05,-215.05 v1(760,-230) ; C2.1 C3.1 ; v1(775,-690) 775.43,-690.43 C4.2 797.64,-772.21 S1.1 ; R6.2 R6.2@1066.61,-777.95 ; v1(1230,720) 1255.43,745.43 D3.2 D2.2 D1.2 ; v1(1525,265) 1535.43,254.57 R8.2 R4.2
  Component Side w20: U3.34@-1518.46,-16.67 -1403.33,-16.67 v1(-1380,-40) ; v1(-1160,65) -1110.23,15.23 U3.12 ; U3.12@-1057.83,14.83 -1006.65,14.83 -986.96,34.51 C13.2@-963.34,34.51 ; v1(-950,-325) -946.52,-321.52 C10.2 ; C16.2 627.36,331.93 C6.2 ; J1.7@1602.66,614.17 J1.7@1603.15,613.68 ; J1.6 J1.7@1603.15,613.68 ; J1.7 J1.7@1603.15,613.68 ; J1.7@1623.15,613.68 J1.7@1603.15,613.68
  Component Side w40: U1.1 920.63,274.65 C7.2 920,59.37 v1(920,7.19) v1(920,-25) ; R6.2 v1(1064.57,-874.57) v1@1065,-875 ; R6.2@1066.61,-777.95 U5.9
  Component Side w50: C6.2@766.1,325.83 869.45,325.83 U1.1 ; C5.2@1409.37,265 v1(1525,265)
  other v1: 1065,-830 40,-640 350,-580 733.49,-491.7 130,-470 580,-445 890,-445 10,-360 350,-320 1455,265 1490,265 820,325 845,325 870,325 -70,550 -30,550 1442,584 1417,585 -70,590 -30,590 1405,609 1433,610
LB#: U2.96 U3.39 | length 1080.9
  Component Side w10: U3.39@-1518.46,-174.15 -1439.72,-174.15 -1170.03,-443.83 -773.83,-443.83 -690,-360 -637.11,-360 U2.96@-599.57,-322.46
LED: R11.2 U2.35 | length 1663.2
  Component Side w10: U2.35 -46.71,370 80,370 130,320 330,320 v1(350,300) ; v1(460,410) 470,410 800,740 970,740 1000,770 1000,810 1030,840 R11.2
  Bottom Layer w10: v1(350,300) v1(460,410)
MISC0: U2.21 U4.43 | length 579.8
  Component Side w10: U2.21 -98.55,-180 283.92,-180 U4.43
MISC1: U2.20 U4.45 | length 620.9
  Component Side w10: U2.20 -106.39,-200 319.6,-200 U4.45
MISC2: U2.19 U4.46 | length 653.7
  Component Side w10: U2.19 -114.23,-220 327.44,-220 U4.46
MISO: TP6.1 U2.30 U4.27 | length 662.7
  Component Side w10: U2.30 -127.51,150 50,150 150,250 297.44,250 U4.27
MOSI: TP5.1 U2.29 U4.28 | length 629.8
  Component Side w10: U2.29 -119.67,130 80,130 180,230 289.6,230 U4.28
NCS: TP8.1 U2.34 U4.25 | length 777.9
  Component Side w10: U2.34 -58.87,330 70,330 110,290 313.11,290 U4.25
NetC2_2: C2.2 U4.5 Y1.2 | length 411
  Component Side w10: U4.5 610,-201.76 610,-290 651.8,-331.8 Y1.2 651.8,-469.06 C2.2
NetC3_2: C3.2 U4.6 Y1.1 | length 545.4
  Component Side w10: U4.6 630,-193.92 630,-250 660,-280 760,-280 815.19,-335.19 Y1.1 815.19,-469.06 C3.2
NetC4_1: C4.1 R5.2 U4.2 | length 721.3
  Component Side w10: U4.2 540,-215.28 540,-694.57 R5.2 C4.1
NetC14_1: C14.1 L1.1 Y2.1 Y2.4 | length 367.7
  Component Side w20: L1.1 10,-549.37 C14.1 86.93,-572.36 Y2.4 Y2.1
NetD1_1: D1.1 R10.1 | length 59.1
  Component Side w10: R10.1 D1.1
NetD2_1: D2.1 R11.1 | length 59.1
  Component Side w10: R11.1 D2.1
NetD3_1: D3.1 R12.1 | length 59.1
  Component Side w10: R12.1 1135.43,780 D3.1
NetF1_2: F1.2 J1.1
NetR5_1: R5.1 S1.2 | length 139.2
  Component Side w10: S1.2 502.36,-772.2 R5.1
NetR6_1: R6.1 U5.10 | length 127
  Component Side w10: R6.1 1145.35,-770.08 U5.10
NetR9_1: R9.1 Y2.3 | length 97.6
  Component Side w10: Y2.3@85.43,-367.64 R9.1
NetR12_2: R12.2 U4.29 | length 1182.9
  Component Side w10: U4.29 356.74,133.26 390,100 v1(420,100) ; v1(490,380) 490,400 810,720 994.57,720 R12.2
  Bottom Layer w10: v1(420,100) 370,150 370,280 470,380 v1(490,380)
NIRQ0: U2.26 U4.3 | length 765.2
  Component Side w10: U2.26 -106.16,60 -10,60 v1(70,-20) ; v1(470,-100) 470,-117.44 U4.3
  Bottom Layer w10: v1(70,-20) 170,-120 450,-120 v1(470,-100)
NIRQ1: U2.27 U4.4 | length 827.7
  Component Side w10: U2.27 -103.99,90 0,90 v1(110,-20) ; v1(500,-80) 500,-119.6 U4.4
  Bottom Layer w10: v1(110,-20) 190,-100 430,-100 460,-70 490,-70 v1(500,-80)
NRST: C1.1 P3.2 R1.1 U2.28 U4.7 | length 1868.5
  Component Side w10: U2.28 -111.83,110 v1(120,110) ; v1(230,440) 230,514.57 360.87,645.43 C1.1 370,770 P3.2 ; v1(520,-50) 520,-56.08 U4.7
  Bottom Layer w10: v1(230,440) 230,420 120,310 120,170 120,10 210,-80 420,-80 450,-50 v1(520,-50)
OE#: U2.98 U3.41 | length 1103.7
  Component Side w10: U3.41@-1518.46,-237.14 -1435.78,-237.14 -1189.72,-483.2 -753.2,-483.2 -670,-400 -621.43,-400 U2.98@-571.73,-350.3
SCK: TP7.1 U2.33 U4.26 | length 728.5
  Component Side w10: U2.33 -71.03,290 50,290 70,270 305.28,270 U4.26
SWCLK: P3.6 U4.37 | length 1245.4
  Component Side w10: v1(230,-10) 257.58,-37.58 U4.37 ; v1(310,440) 310,470 360,520 460,520 650,710 650,850 P3.6
  Bottom Layer w10: v1(230,-10) 180,40 180,290 310,420 v1(310,440)
SWDIO: P3.8 U4.34 | length 1165.1
  Component Side w10: v1(210,110) 242.56,110 U4.34 ; v1(390,440) 390,450 420,480 480,480 750,750 750,850 P3.8
  Bottom Layer w10: v1(210,110) 210,150 240,180 240,270 390,420 v1(390,440)
TCK: TP2.1 U2.24 U4.39 | length 506.2
  Component Side w10: U2.24 -85.03,-110 v1(-70,-110) ; v1(-10,-50) 140,-50 190,-100 252.56,-100 U4.39
  Bottom Layer w10: v1(-70,-110) v1(-10,-50)
TDI: TP4.1 U2.23 U4.41 | length 538.9
  Component Side w10: U2.23 -82.87,-140 -30,-140 0,-110 130,-110 160,-140 268.24,-140 U4.41
TDO: TP3.1 U2.25 U4.40 | length 550.5
  Component Side w10: TP3.1 -89.86,-10 U2.25 -87.2,-80 140,-80 180,-120 260.4,-120 U4.40
TMS: TP1.1 U2.22 U4.42 | length 547
  Component Side w10: U2.22 -90.71,-160 276.08,-160 U4.42
UART1_RXD: P3.7 U4.31 | length 963.7
  Component Side w10: v1(270,160) 276.08,160 U4.31 ; v1(430,440) 470,440 800,770 P3.7
  Bottom Layer w10: v1(270,160) 270,260 430,420 v1(430,440)
UART1_TXD: P3.5 U4.30 | length 1024.7
  Component Side w10: v1(210,200) 280,200 300,180 300,163.92 U4.30 ; v1(350,440) 350,460 390,500 470,500 700,730 P3.5
  Bottom Layer w10: v1(210,200) 210,280 350,420 v1(350,440)
UB#: U2.97 U3.40 | length 1092.3
  Component Side w10: U3.40@-1518.46,-205.64 -1437.75,-205.64 -1179.88,-463.52 -763.52,-463.52 -680,-380 -629.27,-380 U2.97@-585.65,-336.38
USB_D_N: J1.2 U4.32 | length 1439.7
  Component Side w10: U4.32 348.24,60 390,60 v1(400,70)
  Component Side w12: v1(1310,474.41) J1.2@1517.34,474.41
  Bottom Layer w10: v1(400,70) 401,69 431,69 440,60 670,60 740,130 1040,130 1310,400 v1(1310,474.41)
USB_D_P: J1.3 R3.2 U4.33 | length 1658.5
  Component Side w10: R3.2 184.57,140 240.4,140 U4.33 340.2,40.2 340,40 v1(420,40)
  Component Side w12: v1(1340,500) J1.3@1517.34,500
  Bottom Layer w10: v1(420,40) 680,40 750,110 1050,110 1330,390 1330,450 1340,460 v1(1340,500)
USB_PU: R3.1 U4.38 | length 226.2
  Component Side w10: R3.1 160,-40 200,-80 244.73,-80 U4.38
VCC: C6.1 C7.1 C9.1 C10.1 C11.1 C12.1 C13.1 C15.1 C16.1 L1.2 P1.15 P1.16 P2.15 P2.16 P3.3 R1.2 U1.2 U1.4 U2.9 U2.13 U2.31 U2.39 U2.45 U2.59 U2.63 U2.80 U2.88 U2.94 U3.11 U3.33 U4.1 U4.9 U4.24 U4.36 U4.48 U5.8 | length 10075.4
  Component Side w10: U4.36 306.89,-10 ; U4.9 684.54,-164.94 C15.1
  Component Side w12: C10.1@-839.32,-325.72 -839.32,-315.88 -815.7,-315.88 U2.88@-710.92,-211.1 ; U2.80 -792.93,-70 -745,-70 -675,0 ; C9.1@-741.44,328.36 -722.16,309.08 -699.39,309.08 U2.59@-655.25,264.94 ; U2.88 -610.22,-110 -610,-110 -587.5,-87.5 ; U2.63 -591.26,90 -585,90 ; U2.59 -535,145.09 -535,140 ; U2.94 -508.19,-175 v1(-500,-175) ; -500,175 -500,195.09 U2.45 ; -470,-145 -467.62,-145 U2.9 -287.67,-324.95 C11.1@-255.05,-324.95 ; -425,100 -425,103.06 U2.39 ; -413.13,-88.13 U2.13 ; v1(-285,40) -265.35,40 U2.31 -110.4,194.95 C12.1 ; R1.2 v1(290,680) ; 306.89,-10 445,-10 ; U4.1 U4.48 445,-158.11 445,-10 ; C16.1 534.57,237.68 U4.24 476.94,180.05 455.65,158.76 455.65,145.65 445,135 445,-10 ; U4.9 529.6,-10 445,-10
  Component Side w20: U3.33@-1518.46,14.83 -1219.83,14.83 v1(-1205,0) ; U3.11@-1057.83,-16.67 -1006.65,-16.67 -986.96,-36.35 C13.1@-963.34,-36.35 ; C13.1 -936.9,-36.9 v1(-900,0) ; C16.1 534.57,354.57 628.07,448.07 C6.1
  Component Side w25: v1(-200,-590) -180,-570 L1.2
  Component Side w40: v1(-795,0) v1(-765,0) -675,0 ; v1(-500,-175) v1(-475,-200) v1(-450,-225) ; 933.9,448.07 U1.4 1000,23.7 U5.8
  Component Side w50: v1(-285,40) v1(-305,20) v1(-325,0) ; v1(760,565) C6.1 933.9,448.07 ; v1(-325,0) -470,-145 v1(-500,-175) -587.5,-87.5 -675,0 -585,90 -535,140 -500,175 -425,100 v1(-325,0)
  Bottom Layer w40: v1(-1205,0) v1(-765,0)
  Bottom Layer w50: v1(-500,-175) v1(-475,-200) v1(-450,-225) -200,-475 P1.16 P1.15 ; v1(-325,0) v1(-305,20) v1(-285,40) -200,125 -200,680 ; P2.16 P2.15 -200,680 ; P3.3 600,680 ; v1(760,510) 760,570 650,680 600,680 ; -200,680 v1(290,680) 600,680
  other v1: 760,537.5
VIN: C5.1 F1.1 P1.17 P1.18 P2.17 P2.18 P3.10 R7.1 R10.2 U1.3 | length 5497.8
  Component Side w12: P3.10 R10.2 ; C5.1 1334.57,196.38 R7.1
  Component Side w50: P1.18 -100,-922 -42,-980 835,-980 970,-845 970,-590 1260,-300 v1(1260,-220) ; P2.17 -100,927 -47,980 850,980 900,930 ; P3.10 900,930 ; U1.3 1106.38,270 C5.1 ; v1(1260,120) v1(1260,150) v1(1260,180) 1260,189.37 1260.94,190.31 C5.1 ; F1.1@1260,360 1260,630 1340,710 1340,920 1280,980 950,980 900,930 ; F1.1 C5.1
  Bottom Layer w50: v1(1260,-280) v1(1260,-250) v1(1260,-220) v1(1260,120) v1(1260,150) v1(1260,180)
WE#: U2.71 U3.17 | length 266.4
  Component Side w10: U3.17@-1057.83,172.31 -896.68,172.31 U2.71@-822.28,97.91
pads on no net: J1.4 U5.1 U5.2 U5.4 U5.5 U5.6 U5.7 U5.11 U5.13 U5.14
copper on no net: | length 970
  Component Side w10: -1545,600 -1545,725 -1185,725 -1185,600 -1545,600
  other v2: 1518.5,421.26 1518.5,578.74

## Polygon pours and split planes (outlines as drawn)
GND on Component Side "GND-T" (solid, remove dead copper, pour order 4): -90,-230 295,-230 390,-325 390,-590 0,-980 -350,-980 -350,-590
GND on Component Side "GND-T" (solid, remove dead copper, pour order 5): -350,980 100,980 100,510 -350,510
GND on Component Side "GND-T" (solid, pour order 2): 550,-120 820,-120 910.47,-210.47 910.47,-550 550,-550
GND on Bottom Layer "GND-B" (solid, remove dead copper, pour order 6): -1700,1075 1700,1075 1700,-1075 -1700,-1075

## Keep-outs
Keep-Out Layer:
  lines w20: 1564.96,1062.99 cw(c1564.96,944.88) 1683.07,944.88 1683.07,-944.88 cw(c1564.96,-944.88) 1564.96,-1062.99 -1564.96,-1062.99 cw(c-1564.96,-944.88) -1683.07,-944.88 -1683.18,944.99 cw(c-1565.07,944.99) -1565.07,1063.1 1564.96,1063.1

## Other copper
Component Side:
  rectangle net VCC: 840,370 1160,670
  region net VCC: -500,175 -675,0 -500,-175 -325,0
  region net GND: 1517,543 1444.05,543 1385,600 1385,624 1436,624
  region net NetF1_2: 1516.5,456.5 1459.5,456.5 1390.5,387.5 1390.5,330 1426.14,330
  text "WiDSC" at -1525,620 h80

## Silkscreen, mask and mechanical layers (free items; w line width, h text height)
Top Overlay:
  lines w10: -900,-660 -900,-610 -690,-610 ; -900,660 -900,610 -690,610 ; -600,-610 -400,-610 -400,-660 ; -600,610 -400,610 -400,660 ; -300,-980 -300,-1010 0,-1010 0,-980 ; -300,980 -300,1010 0,1010 0,980 ; 100,660 100,610 110,610 ; 110,-660 110,-620 120,-620 ; 190,-620 200,-620 200,-660 ; 190,610 200,610 200,660
  text "11" at -920,980 h40
  text "9" at -810,980 h40
  text "7" at -710,980 h40
  text "5" at -610,980 h40
  text "3" at -510,980 h40
  text "1" at -410,980 h40
  text "1" at 90,980 h40
  text "3" at 190,980 h40
  text "RST" at 430,970 h40
  text "G" at 580,970 h40
  text "CK" at 670,970 h40
  text "D" at 790,970 h40
  text "VIN" at 860,970 h40
  text "CH1" at -1270,820 h100
  text "GND" at -320,720 h40 r270
  text "VCC" at -220,720 h40 r270
  text "VIN" at -120,720 h40 r270
  text "GND" at -20,720 h40 r270
  text "BOOT" at 400,690 h40
  text "V" at 590,690 h40
  text "TX" at 670,690 h40
  text "RX" at 770,690 h40
  text "GND" at 860,690 h40
  text "10" at -930,680 h40
  text "8" at -810,680 h40
  text "6" at -710,680 h40
  text "4" at -610,680 h40
  text "2" at -510,680 h40
  text "0" at -410,680 h40
  text "0" at 90,680 h40
  text "2" at 190,680 h40
  text "D" at -660,590 h50
  text "M" at 135,590 h50
  text "GND" at -320,-610 h40 r270
  text "VCC" at -220,-610 h40 r270
  text "VIN" at -120,-620 h40 r270
  text "GND" at -20,-620 h40 r270
  text "D" at -660,-640 h50
  text "M" at 140,-670 h50
  text "11" at -920,-720 h40
  text "9" at -810,-720 h40
  text "7" at -710,-720 h40
  text "5" at -610,-720 h40
  text "3" at -510,-720 h40
  text "1" at -410,-720 h40
  text "1" at 100,-720 h40
  text "3" at 190,-720 h40
  text "CH2" at -1270,-880 h100
  text "10" at -930,-1020 h40
  text "8" at -810,-1020 h40
  text "6" at -710,-1020 h40
  text "4" at -610,-1020 h40
  text "2" at -500,-1020 h40
  text "0" at -410,-1020 h40
  text "0" at 90,-1020 h40
  text "2" at 190,-1020 h40
Bottom Overlay:
  drawing of 31 lines, arcs and shapes, not listed
  text "11" at -880,980 h40
  text "9" at -790,980 h40
  text "7" at -690,980 h40
  text "5" at -590,980 h40
  text "3" at -490,980 h40
  text "1" at -390,980 h40
  text "1" at 110,980 h40
  text "3" at 210,980 h40
  text "CH1" at -1120,820 h100
  text "GND" at -280,720 h40 r90
  text "VCC" at -180,720 h40 r90
  text "VIN" at -80,720 h40 r90
  text "GND" at 20,720 h40 r90
  text "RST" at 520,720 h40 r90
  text "GND" at 620,720 h40 r90
  text "CLK" at 720,720 h40 r90
  text "DIO" at 820,720 h40 r90
  text "VIN" at 920,720 h40 r90
  text "10" at -870,680 h40
  text "8" at -780,680 h40
  text "6" at -680,680 h40
  text "4" at -580,680 h40
  text "2" at -480,680 h40
  text "0" at -380,680 h40
  text "0" at 120,680 h40
  text "2" at 220,680 h40
  text "SWD" at 1080,640 h40
  text "D" at -630,590 h50
  text "M" at 170,590 h50
  text "BOOT" at 520,580 h40 r90
  text "VCC" at 620,580 h40 r90
  text "TXD" at 720,580 h40 r90
  text "RXD" at 820,580 h40 r90
  text "GND" at 920,580 h40 r90
  text "UART" at 1100,500 h40
  text "WiDSC" at -90,320 h200
  text "by eleqian" at -70,190 h50
  text "v1.0" at -500,90 h40
  text "2016.09.23" at -60,90 h40
  text "GND" at -280,-610 h40 r90
  text "VCC" at -180,-610 h40 r90
  text "VIN" at -80,-610 h40 r90
  text "GND" at 20,-610 h40 r90
  text "M" at 170,-630 h50
  text "D" at -630,-640 h50
  text "11" at -880,-720 h40
  text "9" at -790,-720 h40
  text "7" at -690,-720 h40
  text "5" at -590,-720 h40
  text "3" at -490,-720 h40
  text "1" at -390,-720 h40
  text "1" at 110,-720 h40
  text "3" at 210,-720 h40
  text "CH2" at -1120,-880 h100
  text "10" at -870,-1020 h40
  text "8" at -790,-1020 h40
  text "6" at -690,-1020 h40
  text "4" at -590,-1020 h40
  text "2" at -480,-1020 h40
  text "0" at -390,-1020 h40
  text "0" at 110,-1020 h40
  text "2" at 210,-1020 h40
Top Solder:
  rectangle: -1555,590 -1175,735
  region: 1525.3,540 1443,540 1405,578 1487.3,578
  region: 1525,460 1458,460 1420,422 1498.28,422
Mechanical 15:
  lines w10: -78.74,0 78.74,0 ; 0,-78.74 0,78.74

## Dimensions
-1565.07,1063.1 to -1564.96,-1062.99 on Mechanical 13
-1683.07,-944.88 to 1683.07,-944.88 on Mechanical 13

## Text inside footprints (layer, text, board x,y; h text height)
P1: Top Overlay "1" at -1000,-920 h35; Top Overlay "2" at -1000,-820 h35; Top Overlay "23" at 260,-920 h35; Top Overlay "24" at 260,-820 h35
P2: Top Overlay "1" at -1000,780 h35; Top Overlay "2" at -1000,880 h35; Top Overlay "23" at 260,780 h35; Top Overlay "24" at 260,880 h35
P3: Top Overlay "2" at 400,880 h35; Top Overlay "1" at 420,780 h35; Top Overlay "9" at 960,780 h35; Top Overlay "10" at 960,880 h35